# Altium PCB 电源板5.PcbDoc (part 2 of 3)
Units mm, origin at the board's own origin, x right, y up, seen from the top; angles counter-clockwise.
Board outline 181.19 x 72.37 mm, 2 copper layers (Top Layer, Bottom Layer), stack 0.325 mm thick; 121 components, 93 nets, 519 pads, 51 vias.
Unrouted connection lines stored in the file: 1.
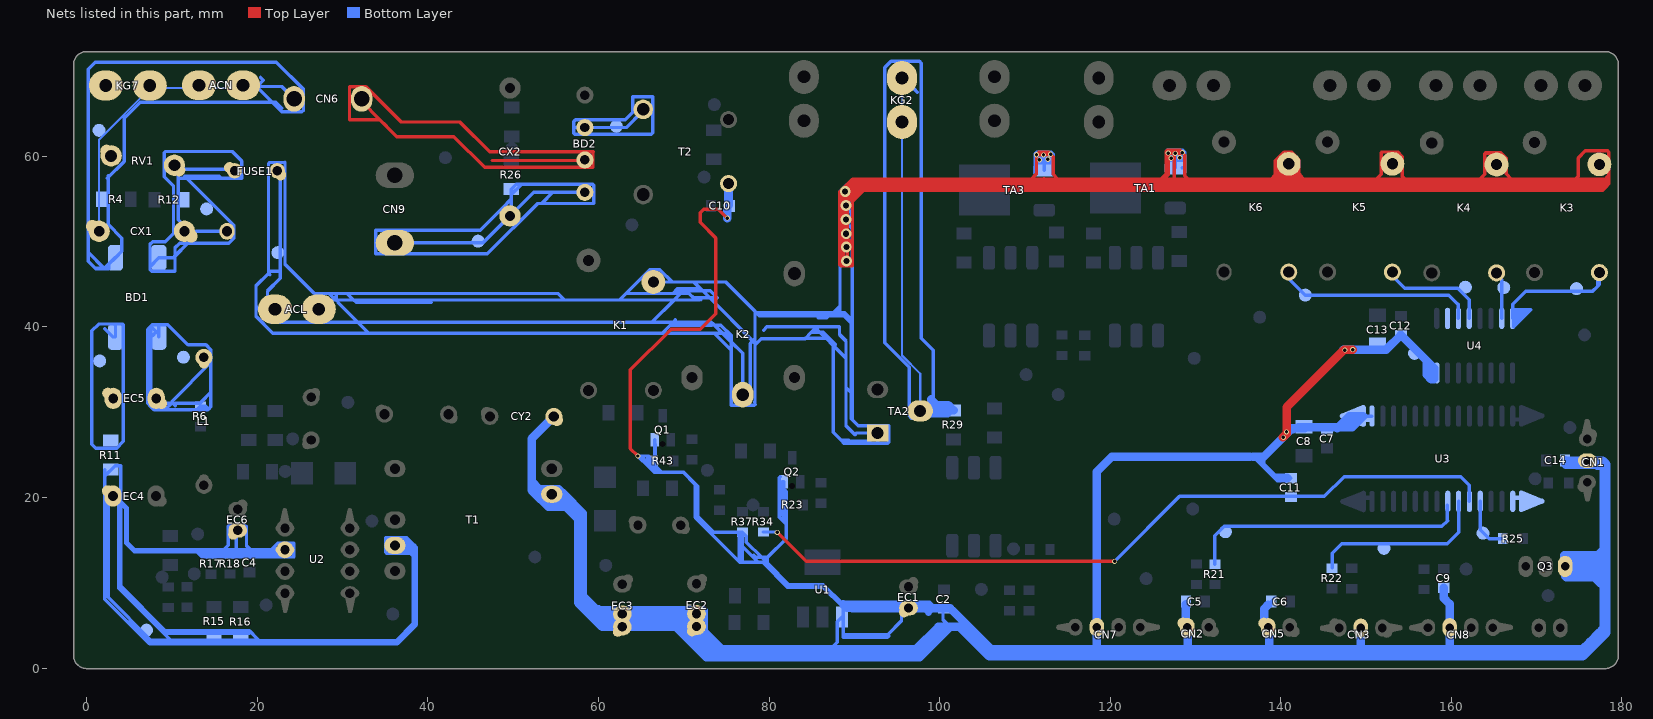
[diagram p2: the nets of this part, all layers, seen from the top]

## Via types
v1: diameter 0.6, hole 0.4, Top Layer to Bottom Layer, 44 vias
v2: diameter 1.27, hole 0.711, Top Layer to Bottom Layer, 7 vias

## Nets (pads, with @x,y where several pads share a name; then routed paths per layer and width w, separated by ;. In a path a pad name is that pad's centre, name@x,y a point inside that pad or via, vN(x,y) a via of type N, cw(c..) or ccw(c..) an arc to the next point about the centre after c; other vN are vias at no path point) (continued)
AC-L: ACL.1 FUSE1.2 K1.3 K2.3 K3.3 K4.3 K5.3 K6.3 pad.2@22.401,48.716 TA1.1 TA2.1 TA3.1 | length 1160.7
  Top Layer w0.4: 88.549,55.251 88.691,55.251 ; v2(88.937,55.883) 89.066,55.883 v2@89.194,55.754 ; v2(89.013,52.617) v2@89.065,52.617 ; v2@89.194,47.404 v2@89.194,49.497 ; 89.494,54.879 89.793,55.178 ; 92.772,56.09 92.719,56.036 ; v1(112.192,60.174) 111.395,60.174 v1(111.371,60.198) ; 112.198,57.413 112.265,57.346 ; 127.597,56.725 126.808,56.725 ; 140.148,57.92 139.681,58.387 139.681,59.395 139.66,59.374 139.66,57.845 ; 140.812,57.23 139.448,57.23 139.432,57.214 139.411,57.235 139.411,57.564 139.461,57.514 139.66,57.514 ; K6.3@141.758,60.023 141.281,60.5 140.393,60.5 139.336,59.443 139.336,57.798 ; K6.3@141.807,59.904 141.807,59.895 142.157,59.545 142.157,57.97 ; K6.3@141.905,58.222 142.157,57.97 ; K5.3@153.01,59.134 153.01,60.475 K5.3@152.971,60.514 ; K4.3@165.099,59.045 K4.3@165.099,60.376 ; 178.455,57.729 178.264,57.537 ; 88.282,47.716 88.323,47.676 88.323,47.273 ; 88.282,47.716 88.691,48.124 v2@88.691,48.131 ; 88.282,47.716 88.282,47.313 88.323,47.273 ; 88.282,47.716 88.282,55.196 ; 88.282,55.196 88.282,55.512 ; 88.282,55.196 90.109,57.022 ; 88.282,55.512 88.282,55.834 89.795,57.346 90.433,57.346 ; 88.282,55.512 89.793,57.022 90.109,57.022 ; 88.323,47.273 88.403,47.192 89.793,47.192 89.793,54.733 ; 88.323,47.273 88.612,47.273 v2(89.081,47.741) v2@88.691,48.131 ; v2@88.691,48.131 v2@88.691,54.754 ; v2@88.691,54.754 88.691,55.251 ; v2@88.691,54.754 89.194,55.258 ; 88.691,55.251 v2@89.194,55.754 ; v2@89.065,52.617 v2(89.065,49.367) v2@89.194,49.497 ; v2@89.065,52.617 89.065,54.745 89.194,54.874 ; v2@89.194,49.497 89.634,49.936 v2@89.194,50.375 ; v2@89.194,49.497 v2@89.194,50.375 ; v2@89.194,50.375 89.194,54.874 ; 89.194,54.874 89.194,55.258 ; 89.194,54.874 89.313,54.992 ; 89.194,55.258 v2@89.313,55.376 ; 89.194,55.258 v2@89.194,55.754 ; v2@89.194,55.754 90.469,57.028 90.894,57.028 ; 89.313,54.992 v2@89.313,55.376 ; 89.313,54.992 89.827,55.507 ; v2@89.313,55.376 89.444,55.507 89.827,55.507 ; v2@89.313,55.376 89.313,55.447 90.894,57.028 ; 89.793,54.733 91.096,56.036 92.719,56.036 ; 89.793,54.733 89.793,55.178 ; 89.793,55.178 91.049,56.434 ; 89.827,55.507 91.045,56.725 91.049,56.725 ; 90.109,57.022 90.433,57.346 ; 90.433,57.346 110.775,57.346 ; 90.894,57.028 91.049,57.028 ; 90.894,57.028 90.966,57.101 91.022,57.101 91.022,57.117 91.049,57.091 91.049,57.028 ; 91.049,56.434 91.049,56.725 ; 91.049,56.434 126.517,56.434 ; 91.049,56.725 91.049,57.028 ; 91.049,56.725 112.39,56.725 ; 91.049,57.028 112.265,57.028 ; 92.719,56.036 177.764,56.036 178.162,56.434 ; 110.775,57.346 112.265,57.346 ; 110.775,57.346 111.371,57.942 v1(111.371,60.198) ; v1(111.371,60.198) 112.976,60.198 v1(113.033,60.255) ; v1(111.371,60.198) 111.656,60.482 112.805,60.482 v1(113.033,60.255) ; 112.265,57.028 112.265,56.85 112.39,56.725 ; 112.265,57.028 112.265,57.346 ; 112.265,57.028 127.544,57.028 ; 112.265,57.346 113.878,57.346 ; 112.39,56.725 126.808,56.725 ; v1(113.033,60.255) 113.326,59.962 113.326,57.899 113.878,57.346 ; 113.878,57.346 125.959,57.346 ; 125.959,57.346 126.588,57.974 126.588,60.627 126.671,60.71 127.95,60.71 ; 125.959,57.346 126.306,57.346 ; 126.306,57.346 126.823,57.863 v1(126.823,60.386) v1@127.544,60.386 ; 126.306,57.346 127.544,57.346 ; 126.517,56.434 126.808,56.725 ; 126.517,56.434 140.39,56.434 ; 126.808,56.725 126.842,56.759 140.715,56.759 ; 127.544,57.028 127.544,57.346 ; 127.544,57.028 127.795,57.028 ; 127.544,57.028 127.544,56.778 127.795,57.028 ; 127.544,57.346 128.113,57.346 ; 127.544,57.346 v1@127.544,60.386 ; v1@127.544,60.386 128.428,60.386 v1(128.485,60.443) ; 127.795,57.028 128.113,57.346 ; 127.795,57.028 138.946,57.028 ; 127.95,60.71 127.963,60.697 128.23,60.697 ; 127.95,60.71 128.217,60.71 128.23,60.697 ; 128.113,57.346 129.17,57.346 ; 128.23,60.697 v1(128.485,60.443) ; v1(128.485,60.443) 128.769,60.158 128.769,57.746 129.17,57.346 ; 129.17,57.346 138.885,57.346 ; 138.885,57.346 139.336,57.798 ; 138.885,57.346 139.264,57.346 ; 138.946,57.028 139.264,57.346 ; 138.946,57.028 140.861,57.028 ; 139.264,57.346 139.336,57.419 139.336,57.798 ; 139.336,57.798 139.384,57.845 139.66,57.845 ; 139.66,57.514 142.157,57.514 142.324,57.346 ; 139.66,57.514 139.66,57.845 ; 139.66,57.845 142.001,57.845 142.234,57.612 142.234,57.831 ; 140.39,56.434 152.876,56.434 ; 140.39,56.434 140.715,56.759 ; 140.715,56.759 140.861,56.905 140.861,57.028 ; 140.715,56.759 153.01,56.759 ; 140.861,57.028 140.861,57.346 142.324,57.346 ; 140.861,57.028 142.642,57.028 ; 142.157,57.97 142.234,57.893 142.234,57.831 ; 142.157,57.97 142.157,57.909 142.234,57.831 ; 142.234,57.831 142.719,57.346 ; 142.324,57.346 142.642,57.028 ; 142.324,57.346 142.719,57.346 ; 142.642,57.028 143.037,57.028 ; 142.719,57.346 143.037,57.028 ; 142.719,57.346 151.232,57.346 ; 143.037,57.028 153.01,57.028 ; 151.232,57.346 151.789,57.903 151.789,60.427 151.876,60.514 K5.3@152.971,60.514 ; 151.232,57.346 153.01,57.346 ; 152.876,56.434 153.01,56.568 153.01,56.759 ; 152.876,56.434 164.744,56.434 ; K5.3@152.971,60.514 153.722,60.514 154.287,59.949 154.287,57.696 154.637,57.346 ; 153.01,56.759 153.01,57.028 ; 153.01,56.759 165.069,56.759 ; 153.01,57.028 153.01,57.346 ; 153.01,57.028 154.954,57.028 ; 153.01,57.346 154.637,57.346 ; 154.637,57.346 154.954,57.028 ; 154.637,57.346 163.362,57.346 ; 154.954,57.028 165.099,57.028 ; 163.362,57.346 163.918,57.901 163.918,60.305 163.989,60.376 ; 163.362,57.346 165.099,57.346 ; 163.989,60.376 K4.3@165.099,60.376 ; 163.989,60.376 164.025,60.412 ; 164.025,60.412 K4.3@165.136,60.412 ; 164.026,60.413 K4.3@165.136,60.413 ; 164.744,56.434 178.162,56.434 ; 164.744,56.434 165.069,56.759 ; 165.069,56.759 177.994,56.759 178.264,57.029 178.264,57.537 ; 165.069,56.759 165.099,56.789 165.099,57.028 ; 165.099,57.028 177.755,57.028 178.072,57.346 ; 165.099,57.028 165.099,57.346 ; 165.099,57.346 167.05,57.346 ; K4.3@165.099,60.376 K4.3@165.136,60.412 ; K4.3@165.136,60.412 165.827,60.412 166.441,59.798 166.441,57.955 167.05,57.346 ; 167.05,57.346 174.581,57.346 ; 174.581,57.346 174.906,57.67 174.906,59.816 175.745,60.655 178.353,60.655 178.504,60.504 178.504,56.776 178.162,56.434 ; 174.581,57.346 178.072,57.346 ; 178.072,57.346 178.264,57.537
  Bottom Layer w0.4: 21.476,46.108 21.308,46.276 21.308,46.302 ; FUSE1.2@22.268,58.273 21.45,58.273 21.308,58.13 ; FUSE1.2@22.677,57.365 22.677,46.547 ; ACL.1@28.091,43.155 31.286,43.155 ; 29.469,42.844 33.046,39.267 ; 40.398,42.872 31.569,42.872 31.286,43.155 ; 56.051,43.155 55.289,43.917 30.524,43.917 ; 59.284,39.267 59.538,39.267 ; K1.3@66.437,45.268 68.631,45.268 ; 68.424,40.209 73.285,40.209 73.446,40.369 ; 68.813,45.268 68.631,45.268 ; 69.018,40.829 69.018,40.803 68.786,40.571 ; 69.233,44.252 69.487,44.252 ; 69.32,44.506 68.731,43.917 ; 72.32,45.268 71.19,45.268 ; 73.596,40.219 74.365,40.219 75.578,39.006 75.578,38.237 ; 75.281,38.833 74.848,39.267 74.549,39.267 ; K2.3@76.924,32.058 76.924,36.892 75.578,38.237 ; K2.3@77.807,32.058 77.807,38.055 78.105,38.353 ; 78.232,38.226 78.105,38.353 ; 78.297,31.185 78.359,31.247 ; 78.359,37.912 79.083,38.636 84.23,38.636 84.97,39.376 ; 78.359,38.607 78.105,38.353 ; 79.375,39.623 79.756,40.004 88.265,40.004 88.265,39.115 89.027,38.353 89.027,36.321 ; 84.246,38.652 86.696,38.652 ; 85.762,41.082 86.765,41.082 86.995,41.312 ; 87.799,37.923 86.346,39.376 85.972,39.376 ; 87.977,41.678 88.323,41.678 ; 89.625,51.63 89.013,52.242 v2(89.013,52.617) 89.425,52.617 89.631,52.41 ; TA3.1@111.231,57.958 111.231,59.291 ; 111.44,59.89 111.449,59.899 v1@112.281,59.899 ; TA3.1@112.281,58.393 112.281,59.28 ; TA3.1@113.326,57.899 113.326,59.28 ; TA1.1@126.671,58.147 126.671,59.496 ; v1(126.823,60.386) 127.393,60.386 127.42,60.358 v1@127.611,60.549 ; 127.544,60.681 127.644,60.582 v1@127.644,60.549 ; TA1.1@127.644,58.637 127.644,59.519 ; TA1.1@128.469,58.648 TA1.1@128.483,58.635 ; v1(128.485,60.443) 128.379,60.549 v1@127.644,60.549 ; TA1.1@128.769,58.124 128.769,59.519 ; 19.836,42.437 19.836,44.83 21.308,46.302 ; 19.836,42.437 21.702,40.571 ACL.1@22.438,40.571 ; 19.836,42.437 19.836,41.233 21.802,39.267 33.046,39.267 ; 21.308,46.302 21.553,46.547 22.677,46.547 ; 21.308,46.302 21.308,58.13 ; 21.308,58.13 21.308,59.166 21.43,59.288 23.227,59.288 23.241,59.302 23.241,47.372 26.697,43.917 28.444,43.917 ; ACL.1@22.438,40.571 66.274,40.571 ; ACL.1@22.438,40.571 21.185,41.825 21.185,44.215 22.677,45.707 22.677,46.547 ; 28.444,43.917 29.234,43.917 ; 28.444,43.917 29.234,43.127 29.234,43.917 ; 29.234,43.917 30.524,43.917 ; 30.524,43.917 31.286,43.155 ; 31.286,43.155 62.447,43.155 ; 33.046,39.267 59.538,39.267 ; 59.538,39.267 67.482,39.267 ; 62.447,43.155 68.858,43.155 ; 62.447,43.155 63.209,43.917 ; 63.209,43.917 65.994,46.702 67.197,46.702 68.631,45.268 ; 63.209,43.917 68.731,43.917 ; 66.274,40.571 68.786,40.571 ; 66.274,40.571 68.858,43.155 ; 67.482,39.267 73.575,39.267 ; 67.482,39.267 68.786,40.571 ; 68.631,45.268 71.19,45.268 ; 68.731,43.917 69.487,43.917 ; 68.786,40.571 73.244,40.571 74.549,39.267 ; 68.858,43.155 69.487,43.784 69.487,43.917 ; 68.858,43.155 71.906,43.155 72.16,43.409 ; 69.487,43.917 69.487,44.252 ; 69.487,43.917 70.636,43.917 71.144,43.409 72.16,43.409 ; 69.487,44.252 72.206,44.252 ; 69.487,44.252 69.487,44.506 71.952,44.506 ; 71.19,45.268 74.91,45.268 78.359,41.82 78.359,31.247 ; 71.19,45.268 71.952,44.506 ; 71.952,44.506 72.206,44.252 ; 72.16,43.409 73.049,43.409 ; 72.206,44.252 73.095,44.252 73.938,43.409 73.049,43.409 ; 72.206,44.252 73.049,43.409 ; 73.049,43.409 78.105,38.353 ; 73.575,39.267 74.549,39.267 ; 73.575,39.267 75.578,37.263 ; 74.549,39.267 75.578,38.237 ; 75.578,37.263 75.578,38.237 ; 75.578,37.263 75.578,30.83 78.293,30.83 78.367,30.904 78.359,30.913 78.359,31.247 ; 84.97,39.376 85.471,39.877 85.972,39.376 ; 84.97,39.376 85.972,39.376 ; 85.972,39.376 86.696,38.652 ; 86.696,38.652 87.523,37.825 ; 86.995,41.312 78.866,41.312 78.486,41.692 87.376,41.692 ; 86.995,41.312 87.376,41.692 ; 86.995,41.312 88.291,41.312 ; 87.376,41.692 87.593,41.692 ; 87.523,37.825 89.027,36.321 ; 87.523,37.825 87.523,27.634 88.456,26.701 ; 87.593,41.692 88.323,42.422 ; 87.593,41.692 87.991,41.692 88.323,42.023 ; 88.291,41.312 88.323,41.343 88.323,41.678 ; 88.291,41.312 88.776,41.312 89.631,40.457 ; 88.323,41.678 88.323,42.023 ; 88.323,41.678 88.866,41.678 89.631,40.913 ; 88.323,42.023 88.323,42.422 ; 88.323,42.422 88.323,53.328 ; 88.323,53.328 88.625,53.63 89.42,53.63 89.631,53.419 ; 88.323,53.328 88.323,55.435 ; 88.323,55.435 88.77,55.883 v2(88.937,55.883) 89.783,55.037 ; 88.323,55.435 88.323,55.874 89.045,56.597 89.607,56.597 89.783,56.42 89.783,55.037 ; 88.456,26.701 89.329,26.701 89.429,26.601 91.774,26.601 TA2.1@92.74,27.567 ; 88.456,26.701 88.826,26.331 88.841,26.346 92.535,26.346 ; 89.027,32.892 89.631,32.287 ; 89.027,32.892 89.027,28.413 90.088,27.352 90.303,27.567 TA2.1@92.74,27.567 ; 89.027,32.892 89.027,36.321 ; 89.631,32.287 89.631,29.243 89.783,29.091 ; 89.631,32.287 89.631,40.457 ; 89.631,40.457 89.631,40.913 ; 89.631,40.913 89.783,41.065 ; 89.631,52.41 89.783,52.259 ; 89.631,52.41 89.631,53.419 ; 89.631,53.419 89.783,53.267 ; 89.783,29.091 89.783,41.065 ; 89.783,29.091 90.445,28.429 94.037,28.429 94.037,26.453 93.93,26.346 92.535,26.346 ; 89.783,41.065 89.783,52.259 ; 89.783,52.259 89.783,53.267 ; 89.783,53.267 89.783,55.037 ; 92.535,26.346 92.74,26.552 TA2.1@92.74,27.567 ; 111.231,59.291 111.242,59.28 112.281,59.28 ; 111.231,59.291 111.231,59.613 ; 111.231,59.613 112.281,59.613 ; 111.231,59.613 v1@111.231,60.338 ; v1@111.231,60.338 111.375,60.482 112.281,60.482 ; v1@111.231,60.338 v1(111.371,60.198) v1@112.281,60.198 ; 112.281,59.28 112.281,59.613 ; 112.281,59.28 113.326,59.28 ; 112.281,59.613 v1@112.281,59.899 ; 112.281,59.613 113.315,59.613 113.326,59.601 ; v1@112.281,59.899 113.326,59.899 ; v1@112.281,59.899 v1@112.281,60.198 ; v1@112.281,60.198 112.281,60.482 ; v1@112.281,60.198 113.252,60.198 v1@113.326,60.272 ; 112.281,60.482 113.116,60.482 v1@113.326,60.272 ; 113.326,59.28 113.326,59.601 ; 113.326,59.601 113.326,59.899 ; 113.326,59.899 v1@113.326,60.272 ; 126.671,59.496 126.693,59.519 127.644,59.519 ; 126.671,59.496 126.671,59.782 ; 126.671,59.782 v1@126.671,60.176 ; 126.671,59.782 v1(127.157,59.782) 127.644,59.782 ; v1@126.671,60.176 v1@127.644,60.176 ; v1@126.671,60.176 126.671,60.71 128.528,60.71 128.769,60.469 128.769,60.148 ; v1@127.611,60.549 v1@127.644,60.516 ; v1@127.611,60.549 v1@127.644,60.549 ; 127.644,59.519 127.644,59.782 ; 127.644,59.519 128.769,59.519 ; 127.644,59.782 v1@127.644,60.176 ; 127.644,59.782 128.688,59.782 128.769,59.7 ; v1@127.644,60.176 v1(127.644,60.362) v1@127.644,60.516 ; v1@127.644,60.176 128.742,60.176 128.769,60.148 ; v1@127.644,60.516 v1@127.644,60.549 ; 128.769,59.519 128.769,59.7 ; 128.769,59.7 128.769,60.148
  other v1: 111.705,59.594 112.714,59.672 128.166,59.86
  other v2: 89.049,50.931 89.031,54.248
AC-N: ACN.1 BD1.2 CN6.2 CX1.2 KG7.1 pad.2@1.427,63.06 R4.1 RV1.2 | length 147.3
  Bottom Layer w0.254: CX1.2@1.443,51.218 1.443,61.991 7.492,68.04 20.035,68.04 20.045,68.04 20.321,67.765
  Bottom Layer w0.4: 2.414,57.422 4.396,59.403 4.396,64.48 6.247,66.332 21.743,66.332 ; 2.488,57.733 2.488,52.033 4.101,50.421 4.101,48.858 BD1.2@3.358,48.115 ; ACN.1@18.3,68.196 ACN.1@19.879,68.196 ; 20.361,69.285 20.704,68.941 ACN.1@19.959,68.196 ; 22.845,65.623 22.136,66.332 21.743,66.332 ; CN6.2@24.309,66.744 22.858,68.196 ACN.1@19.959,68.196 ; 0.155,48.765 2.015,46.904 ; 0.155,48.765 0.155,47.716 0.993,46.877 ; 0.155,48.765 0.155,65.018 0.185,65.048 0.185,70.244 0.979,71.039 22.229,71.039 25.412,67.857 25.412,65.428 25.199,65.216 22.859,65.216 21.743,66.332 ; 0.993,46.877 2.042,46.877 ; 0.993,46.877 1.04,46.83 2.578,46.83 2.578,47.335 BD1.2@3.358,48.115 ; 2.015,46.904 2.042,46.877 ; 2.015,46.904 2.069,46.904 ; 2.042,46.877 2.069,46.904 ; 2.042,46.877 2.12,46.877 2.147,46.904 2.069,46.904 ; 2.069,46.904 3.28,48.115 BD1.2@3.358,48.115 ; ACN.1@19.879,68.196 ACN.1@19.959,68.196 ; ACN.1@19.879,68.196 20.035,68.04 21.743,66.332
ADC_NTC1: pad.2@133.528,15.981 R21.2 U3.21 | length 33.2
  Bottom Layer w0.4: R21.2@132.286,12.192 132.286,15.525 133.365,16.605 158.92,16.605 159.601,17.287 159.556,17.332 U3.21@159.556,19.088
ADC_NTC2: pad.2@152.124,14.039 R22.2 U3.20 | length 21.2
  Bottom Layer w0.4: R22.2@146.033,11.778 146.033,13.466 147.153,14.585 159.546,14.585 160.875,15.915 U3.20@160.875,19.546
ADC_WL: C11.1 R34.1 U3.19 | length 90.6
  Top Layer w0.4: v1(80.968,15.902) 84.357,12.512 v1(120.532,12.512)
  Bottom Layer w0.4: R34.1@79.348,15.949 80.92,15.949 v1(80.968,15.902) ; v1(120.532,12.512) 128.141,20.122 145.108,20.122 147.438,22.452 161.124,22.452 162.145,21.431 U3.19@162.145,19.546
GND: C2.1 C5.1 C6.1 C7.2 C8.1 C9.2 C10.1 C11.2 C12.2 C13.1 C14.2 CN1.2 CN2.1 CN3.2 CN5.1 CN7.2 CN8.2 CY2.2 EC1.2 EC2.2 EC3.2 pad.2@75.349,1.681 pad.2@103.878,3.941 pad.2@155.703,36.906 Q1.E Q2.E Q3.E R23.1 R37.2 R43.1 T1.6 T2.2 U1.1 U3.1 U4.8 | length 920.2
  Top Layer w0.4: v1(64.623,24.869) 63.751,25.74 63.751,34.976 68.513,39.738 71.936,39.738 73.758,41.559 73.758,50.43 71.919,52.268 71.919,53.39 72.334,53.804 74.065,53.804 v1(75.114,52.756)
  Top Layer w1: v1@140.269,27.054 140.694,27.479 140.694,30.581 147.456,37.342 v1(148.465,37.342)
  Bottom Layer w0.4: 57.647,8.696 58.179,8.165 ; 57.88,9.157 58.179,8.858 59.825,7.212 ; 60.11,7.212 59.825,7.212 ; 61.168,7.003 60.033,7.003 ; EC3.2@62.526,6.76 59.583,6.76 58.179,8.165 ; R43.1@66.425,23.762 R43.1@66.498,23.834 ; Q1.E@66.579,26.765 R43.1@66.579,23.915 ; 66.65,23.366 66.579,23.437 ; Q1.E@66.666,26.276 66.666,24.002 R43.1@66.579,23.915 ; 69.793,22.94 69.926,22.94 ; EC2.2@71.054,6.799 EC2.2@70.615,6.799 ; EC2.2@71.497,6.374 72.228,5.643 72.617,5.643 ; 71.65,17.345 71.642,17.353 ; 72.409,3.696 72.617,3.905 72.617,4.445 ; 74.784,15.941 73.504,15.941 ; pad.2@74.868,2.195 72.617,4.445 ; 78.232,13.203 78.455,12.981 79.129,12.981 ; 78.747,12.386 76.874,14.26 ; Q2.E@81.331,22.448 81.187,22.304 81.187,21.491 ; 81.437,10.555 79.825,12.166 79.825,12.285 ; 81.942,20.787 81.756,20.972 ; 87.166,2.195 87.998,3.027 87.998,5.404 U1.1@88.575,5.981 ; 94.074,3.804 93.901,3.63 88.691,3.63 88.689,3.632 88.689,3.927 ; 95.537,7.79 95.537,7.73 ; 101.236,4.821 100.406,5.652 C2.1@100.406,6.737 ; 103.445,4.821 pad.2@103.686,4.581 ; 106.014,2.084 106.183,2.084 ; 118.375,2.59 118.257,2.472 ; CN2.1@128.299,5.539 128.627,5.211 129.052,4.786 129.036,4.771 CN2.1@128.862,4.597 ; 129.363,2.084 129.108,2.084 128.862,2.084 ; 136.407,24.798 136.766,24.798 137.746,23.818 ; C6.1@138.534,7.41 C6.1@138.912,7.788 C6.1@139.315,8.191 ; v1(140.694,27.694) v1@140.931,27.694 ; v1@140.958,27.721 v1@140.931,27.694 ; C11.2@141.035,22.478 C11.2@141.056,22.457 ; C8.1@142.813,28.144 142.474,27.804 142.134,28.144 142.054,28.224 141.525,27.694 v1@140.931,27.694 ; 146.655,28.144 147.36,28.144 147.44,28.224 U3.1@148.755,29.539 149.694,29.539 150.702,29.539 U3.1@150.713,29.55 ; 149.318,2.526 149.264,2.472 ; Q3.E@173.366,10.922 Q3.E@173.366,11.917 Q3.E@173.366,12.342 ; 176.267,2.708 176.267,3.07 176.267,3.137 175.603,2.472 159.824,2.472 149.406,2.472 149.264,2.472 ; 176.457,11.917 176.489,11.884 177.588,11.884 ; CN1.2@176.822,24.033 176.998,23.857 177.111,23.744 177.588,23.266 177.588,13.579 177.588,13.048 177.588,12.07 177.588,11.884 ; 177.324,4.128 177.588,4.392 177.588,9.857 177.588,10.785 177.588,11.884 ; 58.179,8.165 58.544,8.165 59.497,7.212 ; 59.497,7.212 59.705,7.003 60.033,7.003 ; 59.497,7.212 59.825,7.212 ; 59.825,7.212 59.967,7.069 ; 59.967,7.069 60.033,7.003 ; 59.967,7.069 72.382,7.069 72.617,6.834 72.617,5.643 ; 60.033,7.003 60.238,6.799 EC2.2@70.615,6.799 ; 64.865,24.626 65.26,24.626 65.77,24.115 65.946,24.291 R43.1@66.111,24.291 ; 64.865,24.626 65.644,23.848 ; 64.865,24.626 v1(64.623,24.869) 65.848,24.869 R43.1@66.098,24.618 ; 65.644,23.848 65.982,23.848 R43.1@66.295,24.16 ; 65.644,23.848 66.552,22.939 67.393,22.939 ; R43.1@66.098,24.618 65.784,24.618 R43.1@66.111,24.291 ; R43.1@66.098,24.618 R43.1@66.425,24.291 ; R43.1@66.111,24.291 R43.1@66.425,24.291 ; R43.1@66.295,24.16 66.295,23.52 66.496,23.52 66.579,23.437 ; R43.1@66.295,24.16 R43.1@66.425,24.291 ; R43.1@66.425,23.907 R43.1@66.498,23.834 ; R43.1@66.425,23.907 R43.1@66.425,24.291 ; R43.1@66.425,23.907 R43.1@66.498,23.834 ; R43.1@66.498,23.834 R43.1@66.579,23.915 ; R43.1@66.498,23.834 R43.1@66.579,23.754 ; 66.579,23.437 66.579,23.421 66.56,23.402 66.674,23.288 67.044,23.288 ; 66.579,23.437 R43.1@66.579,23.754 ; R43.1@66.579,23.754 67.044,23.288 ; R43.1@66.579,23.754 67.044,23.288 ; R43.1@66.579,23.754 R43.1@66.579,23.915 ; 67.044,23.288 67.393,22.939 ; 67.393,22.939 69.927,22.939 ; 69.927,22.939 70.004,22.939 71.642,21.301 71.642,17.804 ; 69.927,22.939 71.347,21.518 71.347,18.098 ; EC2.2@70.615,6.799 70.615,6.447 70.688,6.374 71.093,5.97 72.617,4.445 ; 71.347,18.098 71.642,17.804 ; 71.347,18.098 71.347,17.647 71.642,17.353 ; 71.642,17.353 71.642,17.804 ; 71.642,17.353 71.642,17.326 73.027,15.941 ; 71.642,17.804 73.504,15.941 ; 72.617,4.445 72.617,5.643 ; 73.027,15.941 76.581,12.386 76.874,12.386 ; 73.027,15.941 73.504,15.941 ; 73.504,15.941 R37.2@76.72,15.941 ; R37.2@76.72,15.941 76.426,15.646 76.524,15.548 76.524,12.736 76.874,12.386 ; R37.2@76.72,15.941 R37.2@76.874,15.941 ; 76.874,12.386 76.874,14.26 ; 76.874,12.386 79.243,12.386 82.147,9.482 83.1,9.482 ; 76.874,14.26 R37.2@76.874,15.941 ; R37.2@76.874,15.941 77.355,15.46 77.355,14.756 79.129,12.981 ; 79.129,12.981 79.825,12.981 ; 79.129,12.981 79.825,12.285 ; 79.825,12.285 79.825,12.981 ; 79.825,12.285 82.329,9.781 82.802,9.781 ; 79.825,12.981 82.028,15.184 82.028,16.86 ; 81.187,21.491 81.54,21.844 Q2.E@81.756,21.844 ; 81.187,21.491 81.187,17.701 82.028,16.86 ; 81.756,17.712 81.756,17.454 82.028,17.183 ; 81.756,17.712 81.495,17.973 81.495,21.583 Q2.E@81.756,21.844 ; 81.756,17.712 81.756,20.956 ; 81.756,20.956 82.028,20.684 82.028,17.183 ; 81.756,20.956 81.756,20.972 ; 81.756,20.972 Q2.E@81.756,21.844 ; 82.028,16.86 82.028,17.183 ; 82.802,9.781 86.376,9.781 88.689,7.468 ; 82.802,9.781 83.1,9.482 ; 83.1,9.482 86.32,9.482 U1.1@88.689,7.113 ; 88.689,3.927 93.904,3.927 95.537,5.56 EC1.2@95.537,6.737 ; 88.689,3.927 U1.1@88.689,7.113 ; U1.1@88.689,7.113 88.689,7.468 ; 88.689,7.468 88.689,7.73 ; 88.689,7.73 95.537,7.73 ; 88.689,7.73 89.356,7.063 89.681,6.737 EC1.2@95.537,6.737 ; EC1.2@95.537,6.737 95.537,7.063 95.537,7.73 ; EC1.2@95.537,6.737 98.245,6.737 ; 95.537,7.73 98.861,7.73 99.272,7.318 C2.1@99.825,7.318 ; 98.245,6.737 99.163,6.737 ; 98.245,6.737 98.704,6.279 99.163,6.737 ; 99.163,6.737 C2.1@100.406,6.737 ; C2.1@99.825,7.318 100.116,7.028 C2.1@100.406,6.737 ; C2.1@99.825,7.318 100.949,7.318 101.239,7.028 101.529,6.737 C2.1@100.406,6.737 ; 106.183,2.084 106.072,2.195 105.794,2.472 108.049,2.472 ; 106.183,2.084 107.661,2.084 ; 107.661,2.084 107.772,2.195 108.049,2.472 ; 107.661,2.084 118.338,2.084 127.86,2.084 ; 108.049,2.472 118.257,2.472 ; 118.257,2.472 118.453,2.472 127.472,2.472 ; 127.472,2.472 128.862,2.472 ; 127.472,2.472 127.749,2.195 127.86,2.084 ; 127.86,2.084 128.862,2.084 ; 128.862,2.084 128.862,2.195 128.862,2.472 ; 128.862,2.472 129.108,2.472 138.668,2.472 149.264,2.472 ; 137.746,23.818 138.035,23.529 ; 137.746,23.818 137.746,24.509 138.035,24.798 138.035,23.935 ; 138.035,23.529 139.301,22.264 ; 138.035,23.529 138.035,23.935 ; 138.035,23.935 139.344,22.627 ; 139.301,22.264 139.706,22.264 ; 139.301,22.264 139.614,21.95 140.884,21.95 C11.2@141.198,22.264 ; 139.344,22.627 140.835,22.627 C11.2@141.198,22.264 ; 139.344,22.627 139.706,22.264 ; 139.706,22.264 C11.2@141.198,22.264
  Bottom Layer w1: CY2.2@54.767,29.503 52.168,26.904 52.168,21.84 ; 56.184,18.926 54.099,18.926 52.647,20.378 ; 59.778,6.387 59.791,6.374 70.688,6.374 EC2.2@71.497,6.374 71.093,5.97 70.702,5.58 68.325,5.58 ; v1(75.114,52.756) 75.124,52.766 75.124,54.15 75.252,54.278 T2.2@75.252,56.558 ; 88.689,7.468 89.094,7.063 89.356,7.063 95.537,7.063 99.02,7.063 99.055,7.028 100.116,7.028 101.239,7.028 ; 101.529,6.737 103.445,4.821 102.36,4.821 ; pad.2@103.686,4.581 105.794,2.472 ; 105.903,2.195 106.072,2.195 107.772,2.195 118.449,2.195 ; 118.338,2.084 118.449,2.195 ; C5.1@128.899,7.476 128.899,5.483 128.627,5.211 CN2.1@128.612,5.196 129.036,4.771 129.108,4.7 129.108,2.472 129.108,2.195 ; 129.108,2.084 129.108,2.195 ; 136.407,24.798 120.21,24.798 118.453,23.041 CN7.2@118.453,4.783 118.453,2.472 118.453,2.198 118.449,2.195 ; 136.766,24.798 138.035,24.798 v1@140.931,27.694 ; C6.1@138.534,7.41 138.095,6.971 CN5.1@138.095,5.186 138.668,4.613 138.668,2.472 138.668,2.195 ; v1@140.958,27.721 141.381,28.144 142.134,28.144 C8.1@142.813,28.144 ; C8.1@142.054,28.224 146.735,28.224 ; 146.655,28.144 146.735,28.224 ; v1@147.343,37.342 152.389,37.342 C12.2@154.101,39.055 157.156,36 ; CN3.2@149.406,4.692 149.406,2.472 149.406,2.195 ; C9.2@159.129,9.4 159.129,8.205 159.824,7.511 CN8.2@159.824,4.747 159.824,2.472 159.824,2.287 159.916,2.195 ; C14.2@173.301,24.28 173.339,24.317 C14.2@173.353,24.317 ; C14.2@173.353,24.338 C14.2@173.353,24.317 ; Q3.E@173.366,10.922 173.366,10.787 173.479,10.674 176.771,10.674 177.588,9.857 ; Q3.E@173.955,12.587 174.072,12.47 177.01,12.47 ; 176.489,11.884 176.908,11.465 ; 177.111,23.744 177.522,23.744 ; 177.324,4.128 176.267,3.07 175.392,2.195 159.916,2.195 ; 177.424,23.888 177.401,23.866 ; 177.588,4.392 178.21,5.014 ; 177.686,23.581 177.522,23.744 ; 52.168,21.84 53.018,20.99 55.325,20.99 55.937,20.378 ; 52.168,21.84 52.168,20.857 52.647,20.378 ; 52.647,20.378 T1.6@54.524,20.378 ; T1.6@54.524,20.378 55.937,20.378 ; T1.6@54.524,20.378 55.472,19.43 55.68,19.43 57.616,17.494 57.616,7.642 58.179,7.079 ; 55.937,20.378 58.179,18.137 58.179,8.858 58.179,8.165 58.179,7.372 ; 58.179,7.079 60.428,4.829 EC3.2@62.802,4.829 69.076,4.829 ; 58.179,7.079 58.179,7.372 ; 58.179,7.372 58.657,7.372 60.449,5.58 68.325,5.58 ; 68.325,5.58 69.076,4.829 ; 69.076,4.829 70.195,4.829 ; 69.076,4.829 72.621,1.284 73.741,1.284 ; 70.195,4.829 73.741,1.284 ; 70.195,4.829 71.276,4.829 72.409,3.696 73.91,2.195 74.868,2.195 87.166,2.195 97.246,2.195 99.873,4.821 101.236,4.821 ; 73.741,1.284 97.699,1.284 101.236,4.821 ; 101.236,4.821 102.36,4.821 ; 102.36,4.821 105.819,1.362 149.563,1.362 ; 118.449,2.195 127.749,2.195 128.862,2.195 129.108,2.195 ; 129.108,2.195 138.668,2.195 ; 138.668,2.195 149.406,2.195 ; 146.735,28.224 147.44,28.224 148.379,28.224 149.694,29.539 U3.1@149.705,29.55 148.062,29.55 146.735,28.224 ; 149.406,2.195 149.406,1.52 149.563,1.362 ; 149.406,2.195 159.916,2.195 ; 149.563,1.362 175.431,1.362 178.21,4.142 178.21,5.014 ; 157.156,36 157.156,34.374 157.654,33.876 157.934,33.876 ; 157.156,36 157.997,35.159 157.997,34.452 ; 157.934,33.876 157.997,33.939 157.997,34.452 ; 157.934,33.876 157.934,34.389 157.997,34.452 ; C14.2@173.353,24.317 173.353,23.954 173.45,23.857 176.998,23.857 177.393,23.857 177.401,23.866 ; C14.2@173.353,24.317 CN1.2@175.969,24.317 CN1.2@176.95,24.317 ; Q3.E@173.366,11.917 176.457,11.917 177.01,12.47 ; Q3.E@173.366,11.917 173.272,12.01 173.272,13.208 177.217,13.208 177.588,13.579 178.21,14.201 ; Q3.E@173.366,11.917 173.817,11.465 176.908,11.465 ; 176.908,11.465 177.588,10.785 178.21,10.163 ; CN1.2@176.95,24.317 177.401,23.866 ; CN1.2@176.95,24.317 177.767,24.317 ; 177.01,12.47 177.409,12.07 177.588,12.07 178.21,12.07 ; 177.01,12.47 177.588,13.048 178.08,13.54 178.21,13.54 ; 177.401,23.866 177.522,23.744 ; 177.522,23.744 178.081,23.744 178.21,23.874 ; 177.767,24.317 177.779,24.329 178.21,23.898 178.21,23.874 ; 177.767,24.317 178.21,23.874 ; 178.21,5.014 178.21,10.163 ; 178.21,10.163 178.21,12.07 ; 178.21,12.07 178.21,13.54 ; 178.21,13.54 178.21,14.201 ; 178.21,14.201 178.21,23.874
  other v1: 140.319,27.05 147.539,37.289
GSS: C4.1 EC4.2 EC6.2 pad.2@6.996,4.442 R11.2 R15.2 R16.1 R17.1 R18.1 T1.4 U2.2 | length 309.6
  Bottom Layer w0.4: R11.2@2.119,23.264 2.119,22.522 ; EC4.2@2.491,20.706 2.491,8.28 7.513,3.258 9.815,3.258 ; 4.819,14.685 4.753,14.751 ; 12.898,13.622 12.903,13.628 ; R17.1@15.187,13.832 R17.1@15.187,13.659 ; EC6.2@17.085,16.209 EC6.2@17.158,16.137 ; R18.1@17.34,13.657 R18.1@17.342,13.659 ; EC6.2@17.507,16.546 EC6.2@17.507,16.137 ; EC6.2@17.532,15.763 EC6.2@17.507,15.788 ; EC6.2@17.688,16.137 EC6.2@17.507,16.137 ; C4.1@19.093,13.436 C4.1@19.093,13.659 ; 19.163,4.195 19.034,4.065 9.009,4.065 ; 38.051,13.708 38.051,14.039 38.033,14.056 ; 38.565,13.229 38.325,13.468 ; EC4.2@2.119,21.117 2.119,22.522 ; EC4.2@2.119,21.117 EC4.2@3.062,20.173 ; EC4.2@2.119,21.117 2.119,8.067 7.348,2.838 20.569,2.838 ; 2.119,22.522 3.338,23.741 3.959,23.741 EC4.2@3.959,19.57 ; EC4.2@3.062,20.173 EC4.2@3.735,19.501 ; EC4.2@3.062,20.173 3.356,20.173 EC4.2@3.959,19.57 ; 3.735,16.441 EC4.2@3.735,19.501 ; 3.735,16.441 3.735,9.338 9.009,4.065 ; 3.735,16.441 3.959,16.217 ; EC4.2@3.735,19.501 3.959,19.276 ; 3.959,16.217 3.959,9.616 9.194,4.381 19.078,4.381 20.009,3.449 ; 3.959,16.217 3.959,19.276 ; 3.959,19.276 4.548,18.687 4.548,14.956 ; 3.959,19.276 EC4.2@3.959,19.57 ; EC4.2@3.959,19.57 4.753,18.777 4.753,14.751 ; 4.548,14.956 4.548,14.647 5.536,13.659 12.871,13.659 ; 4.548,14.956 4.753,14.751 ; 4.753,14.751 5.633,13.871 12.66,13.871 ; 9.009,4.065 9.815,3.258 ; 9.815,3.258 20.009,3.258 ; 12.66,13.871 R17.1@14.077,13.871 ; 12.66,13.871 12.871,13.659 ; 12.871,13.659 12.903,13.628 ; 12.871,13.659 12.935,13.659 ; 12.903,13.628 12.935,13.659 ; 12.903,13.628 13.264,13.267 ; 12.935,13.659 R17.1@14.288,13.659 ; 13.264,13.267 14.398,13.267 R17.1@14.539,13.409 ; 13.264,13.267 13.51,13.02 24.24,13.02 24.291,13.071 24.277,13.084 24.277,14.632 22.368,14.632 21.749,14.012 ; R17.1@14.077,13.871 R17.1@14.288,13.659 ; R17.1@14.077,13.871 15.404,13.871 ; R17.1@14.288,13.659 R17.1@14.539,13.409 ; R17.1@14.288,13.659 R17.1@15.187,13.659 ; R17.1@14.539,13.409 22.772,13.409 U2.2@23.023,13.659 ; R17.1@15.187,13.659 15.187,13.654 15.193,13.659 ; R17.1@15.187,13.659 15.193,13.659 ; 15.193,13.659 15.404,13.871 ; 15.193,13.659 15.875,13.659 ; 15.404,13.871 16.086,13.871 ; 15.875,13.659 16.086,13.871 ; 15.875,13.659 R18.1@17.342,13.659 ; 16.086,13.871 16.589,14.374 16.589,16.047 ; 16.086,13.871 17.507,13.871 ; 16.589,16.047 16.679,16.137 EC6.2@17.158,16.137 ; 16.589,16.047 16.589,16.659 16.691,16.761 18.544,16.761 18.723,16.582 18.723,14.329 19.093,13.959 C4.1@19.093,13.871 ; EC6.2@17.158,16.137 EC6.2@17.507,16.137 ; EC6.2@17.158,16.137 EC6.2@17.507,15.788 ; R18.1@17.342,13.659 17.507,13.824 17.507,13.871 ; R18.1@17.342,13.659 C4.1@19.093,13.659 ; 17.507,13.871 EC6.2@17.507,15.788 ; 17.507,13.871 C4.1@19.093,13.871 ; EC6.2@17.507,15.788 EC6.2@17.507,16.137 ; C4.1@19.093,13.659 21.396,13.659 ; C4.1@19.093,13.659 C4.1@19.093,13.871 ; C4.1@19.093,13.871 21.607,13.871 ; 20.009,3.258 20.009,3.193 20.266,3.193 ; 20.009,3.258 20.009,3.449 ; 20.009,3.449 20.266,3.193 ; 20.266,3.193 20.569,2.89 20.569,2.838 ; 20.266,3.193 36.262,3.193 38.291,5.221 ; 20.569,2.838 36.434,2.838 38.641,5.046 38.641,5.572 ; 21.396,13.659 21.607,13.871 ; 21.396,13.659 U2.2@23.023,13.659 ; 21.607,13.871 U2.2@23.234,13.871 ; 21.607,13.871 21.749,14.012 ; 21.749,14.012 23.093,14.012 U2.2@23.234,13.871 ; U2.2@23.023,13.659 U2.2@23.234,13.871 ; T1.4@36.331,14.171 T1.4@36.446,14.056 ; T1.4@36.331,14.171 T1.4@36.124,14.378 T1.4@36.625,14.378 ; T1.4@36.331,14.171 T1.4@37.23,14.171 ; T1.4@36.446,14.056 36.86,13.642 37.759,13.642 ; T1.4@36.446,14.056 37.345,14.056 ; T1.4@36.625,14.378 37.325,15.078 37.336,15.066 37.336,15.049 37.747,14.638 38.174,14.638 ; T1.4@36.625,14.378 T1.4@37.003,14.378 ; T1.4@37.003,14.378 37.354,14.73 37.354,14.735 37.711,14.378 ; T1.4@37.003,14.378 T1.4@37.023,14.378 ; T1.4@37.023,14.378 T1.4@37.23,14.171 ; T1.4@37.023,14.378 37.711,14.378 ; T1.4@37.23,14.171 37.918,14.171 ; T1.4@37.23,14.171 37.345,14.056 ; 37.345,14.056 38.033,14.056 ; 37.345,14.056 37.759,13.642 ; 37.711,14.378 37.914,14.378 ; 37.711,14.378 37.918,14.171 ; 37.759,13.642 38.112,13.642 38.314,13.844 ; 37.759,13.642 37.932,13.468 ; 37.914,14.378 38.174,14.638 ; 37.914,14.378 38.434,14.378 ; 37.918,14.171 38.033,14.056 ; 37.918,14.171 38.641,14.171 ; 37.932,13.468 38.291,13.11 38.291,5.221 ; 37.932,13.468 38.325,13.468 ; 37.932,13.468 35.142,13.468 35.033,13.577 35.033,15.277 35.041,15.285 37.527,15.285 38.174,14.638 ; 38.033,14.056 38.103,14.056 38.314,13.844 ; 38.174,14.638 38.434,14.378 ; 38.291,5.221 38.641,5.572 ; 38.314,13.844 38.325,13.833 38.325,13.468 ; 38.314,13.844 38.641,14.171 ; 38.434,14.378 38.641,14.171 ; 38.641,5.572 38.641,14.171
H2: KG2.1 R29.2 TA2.2 | length 144.2
  Bottom Layer w0.254: KG2.1@95.598,68.617 95.598,63.466 95.598,36.647 97.731,34.514 TA2.2@97.731,30.153
  Bottom Layer w0.4: KG2.1@97.004,67.922 97.384,67.542 ; TA2.2@98.487,29.397 TA2.2@98.281,29.604 ; R29.2@101.15,30.203 R29.2@101.637,30.203 101.037,29.604 TA2.2@98.281,29.604 ; TA2.2@97.731,30.153 96.893,29.314 96.687,29.314 96.431,29.57 96.431,35.297 93.593,38.135 93.593,70.427 94.305,71.139 97.652,71.139 97.861,70.93 97.861,38.664 99.267,37.258 99.267,31.177 99.267,30.203 ; TA2.2@97.731,30.153 97.781,30.203 99.267,30.203 ; TA2.2@97.731,30.153 99.043,30.153 99.267,29.928 99.267,30.203 ; TA2.2@97.731,30.153 TA2.2@98.281,29.604
  Bottom Layer w1: 99.042,31.539 99.042,31.402 99.267,31.177 99.636,30.808 ; 99.267,30.203 100.241,30.203 ; R29.2@101.15,30.203 100.241,30.203 ; R29.2@101.637,30.203 101.031,30.808 99.636,30.808 ; 99.636,30.808 100.241,30.203
K3: K3.2 pad.2@174.698,44.498 U4.16 | length 31.3
  Bottom Layer w0.4: U4.16@167.224,41.985 167.283,42.045 169.342,42.045 169.342,42.017 167.349,40.024 167.349,40.856 U4.16@167.203,41.002 ; 167.685,41.559 167.691,41.553 167.691,41.402 167.703,41.413 167.936,41.413 ; 176.609,44.197 177.386,44.973 K3.2@177.386,46.373 ; K3.2@176.743,46.003 177.167,46.428 177.167,44.796 176.561,44.19 168.731,44.19 167.203,42.662 U4.16@167.203,41.002 ; U4.16@167.203,41.002 167.522,41.002 ; 167.522,41.002 167.936,41.002 ; 167.522,41.002 167.522,40.532 167.598,40.456 167.936,40.795 167.936,41.002 ; 167.522,41.002 167.522,41.676 167.528,41.682 168.082,41.682 ; 167.936,41.002 167.936,41.413 ; 167.936,41.002 168.003,41.002 168.373,41.373 ; 167.936,41.413 167.936,41.536 168.082,41.682 ; 167.936,41.413 168.03,41.413 168.07,41.373 168.373,41.373 ; 168.082,41.682 168.683,41.682 168.373,41.373 ; 168.082,41.682 168.222,41.822 168.882,41.822 168.432,41.373 168.373,41.373
K4: K4.2 pad.2@166.169,44.614 U4.15 | length 5.7
  Bottom Layer w0.4: K4.2@165.099,46.345 165.933,45.511 U4.15@165.933,41.002
K5: K5.2 pad.2@161.662,44.66 U4.12 | length 12.8
  Bottom Layer w0.4: K5.2@153.01,46.434 153.01,46.082 154.558,44.534 160.776,44.534 162.123,43.187 U4.12@162.123,41.002
K6: K6.2 pad.2@142.898,43.734 U4.11 | length 23.6
  Bottom Layer w0.4: K6.2@140.861,46.434 140.861,45.771 pad.2@142.898,43.734 159.729,43.734 160.793,42.671 160.853,42.671 U4.11@160.853,41.002
K7: U4.10
LAMP: pad.2@163.735,15.812 R25.2 U3.18 | length 6.4
  Bottom Layer w0.4: U3.18@163.415,19.546 163.415,16.2 164.446,15.169 R25.2@166.067,15.169
MS: U3.15
NetBD1_1: BD1.1 EC5.1 L1.1@13.732,35.927 L1.1@13.732,36.427 pad.2@11.326,36.449 R6.1 | length 61.2
  Bottom Layer w0.4: BD1.1@7.7,38.958 BD1.1@8.162,39.42 ; BD1.1@8.182,39.44 BD1.1@8.162,39.42 ; BD1.1@8.438,38.815 BD1.1@8.438,39.144 ; EC5.1@8.679,31.07 9.933,31.07 9.152,30.289 ; EC5.1@7.501,30.66 7.501,40.081 ; EC5.1@7.501,30.66 7.121,31.04 7.121,39.701 7.501,40.081 ; EC5.1@7.501,30.66 7.872,30.289 9.152,30.289 ; 7.501,40.081 BD1.1@8.162,39.42 ; 7.501,40.081 7.688,40.268 BD1.1@8.347,40.268 ; BD1.1@8.162,39.42 BD1.1@8.438,39.144 ; BD1.1@8.347,40.268 8.438,40.177 BD1.1@8.438,39.144 ; BD1.1@8.347,40.268 9.512,40.268 10.153,39.627 10.153,39.617 11.859,37.911 13.973,37.911 14.548,37.336 L1.1@14.548,35.853 ; 9.152,30.289 R6.1@12.89,30.289 ; R6.1@12.89,30.289 R6.1@13.305,30.704 13.926,30.704 14.269,30.361 ; R6.1@12.89,30.289 14.198,30.289 14.269,30.361 ; 14.269,30.361 14.548,30.639 14.548,32.33 ; 14.548,32.33 13.328,31.11 13.288,31.07 10.367,31.07 10.367,30.78 10.005,31.142 10.005,31.309 L1.1@14.548,35.853 ; 14.548,32.33 L1.1@14.548,35.853
NetBD1_2: BD1.3 CX1.1 FUSE1.1 pad.2@14.046,53.842 pad.2@16.443,51.218 R12.2 RV1.1 | length 90.9
  Bottom Layer w0.4: 10.949,57.467 10.989,57.427 11.706,57.427 ; CX1.1@12.201,51.057 10.703,52.555 RV1.1@10.703,58.515 16.616,58.515 FUSE1.1@17.266,57.865 ; CX1.1@12.243,50.634 12.827,51.218 pad.2@16.443,51.218 ; 16.011,49.814 13.329,49.814 ; FUSE1.1@17.268,57.863 FUSE1.1@17.266,57.865 ; FUSE1.1@17.268,58.273 17.268,57.868 FUSE1.1@17.266,57.865 ; 7.407,47.084 BD1.3@8.438,48.115 10.139,48.115 10.341,48.317 ; 7.407,47.084 7.407,46.758 7.612,46.553 10.341,46.553 10.341,48.317 ; 7.407,47.084 7.407,49.679 7.711,49.983 9.2,49.983 10.159,50.942 10.159,56.574 9.097,57.637 9.097,60.425 9.249,60.578 17.065,60.578 18.185,59.458 18.185,57.427 16.827,57.427 ; 10.341,48.317 11.838,49.814 ; 10.341,48.317 10.341,49.281 10.874,49.814 11.838,49.814 ; 11.706,57.427 15.782,57.427 ; 11.706,57.427 11.459,57.674 15.536,57.674 15.782,57.427 ; 11.706,57.427 17.216,51.917 17.216,50.383 16.647,49.814 13.329,49.814 ; 11.838,49.814 11.902,49.814 ; 11.838,49.814 11.87,49.846 11.902,49.814 ; 11.902,49.814 13.329,49.814 ; 15.782,57.427 16.827,57.427 ; 16.827,57.427 FUSE1.1@17.266,57.865
NetBD1_4: BD1.4 EC5.2 pad.2@1.507,36.015 R11.1 | length 38.5
  Bottom Layer w0.4: 2.105,39.803 3.093,38.815 BD1.4@3.358,38.815 3.358,40.219 3.236,40.341 ; 3.236,40.341 1.375,40.341 0.572,39.538 0.572,26.259 1.041,25.79 3.509,25.79 4.29,26.57 4.29,40.258 4.207,40.341 3.236,40.341
NetBD2_1: BD2.1 CN9.1 CX2.1 pad.2@45.885,50.061 R26.2 | length 95.3
  Bottom Layer w0.254: 48.717,53.933 CX2.1@49.628,53.022
  Bottom Layer w0.4: 48.713,53.936 49.781,55.005 ; 48.717,53.933 46.12,51.336 43.867,51.336 33.859,51.336 33.859,49.856 ; BD2.1@58.405,55.786 54.644,55.786 ; 59.448,54.491 59.465,54.474 ; 33.859,49.856 CN9.1@36.12,49.856 46.462,49.856 CX2.1@49.628,53.022 CX2.1@49.781,53.176 ; 33.859,49.856 33.859,48.589 46.976,48.589 52.86,54.474 53.331,54.474 ; CX2.1@49.781,53.176 52.392,55.786 54.644,55.786 ; CX2.1@49.781,53.176 49.781,55.005 ; 49.781,55.005 R26.2@49.781,55.532 ; R26.2@49.781,55.532 R26.2@49.781,56.164 50.372,56.754 51.003,56.754 ; R26.2@49.781,55.532 51.003,56.754 ; 51.003,56.754 59.327,56.754 59.465,56.616 59.465,54.474 ; 53.331,54.474 59.465,54.474 ; 53.331,54.474 54.644,55.786
NetBD2_2: BD2.3 pad.2@62.11,63.523 T2.3 | length 35.4
  Bottom Layer w0.4: 57.116,63.2 57.106,63.209 ; T2.3@65.164,65.31 63.24,63.386 BD2.3@58.405,63.386 57.212,63.386 57.106,63.493 ; 57.106,63.209 57.106,63.493 ; 57.106,63.209 57.106,62.696 57.22,62.582 66.184,62.582 66.359,62.757 66.359,66.932 66.4,66.973 64.035,66.973 63.998,66.936 63.998,65.159 63.134,64.295 57.308,64.295 57.106,64.093 57.106,63.493
NetBD2_3: BD2.2 CN6.1 | length 83.7
  Top Layer w0.4: 30.865,64.299 30.865,64.302 ; CN6.1@32.229,66.744 32.229,66.446 34.362,64.313 ; 35.1,63.578 34.365,64.313 34.362,64.313 ; 47.548,59.519 BD2.2@58.64,59.519 ; 34.362,64.313 30.848,64.313 30.804,64.357 30.804,68.166 32.736,68.166 36.869,64.033 43.755,64.033 47.258,60.531 59.386,60.531 59.36,60.505 59.36,58.765 59.307,58.712 46.651,58.712 43.044,62.318 36.357,62.318 34.362,64.313